# EAGLE board guc_kaynagi (EAGLE 9.6.2)
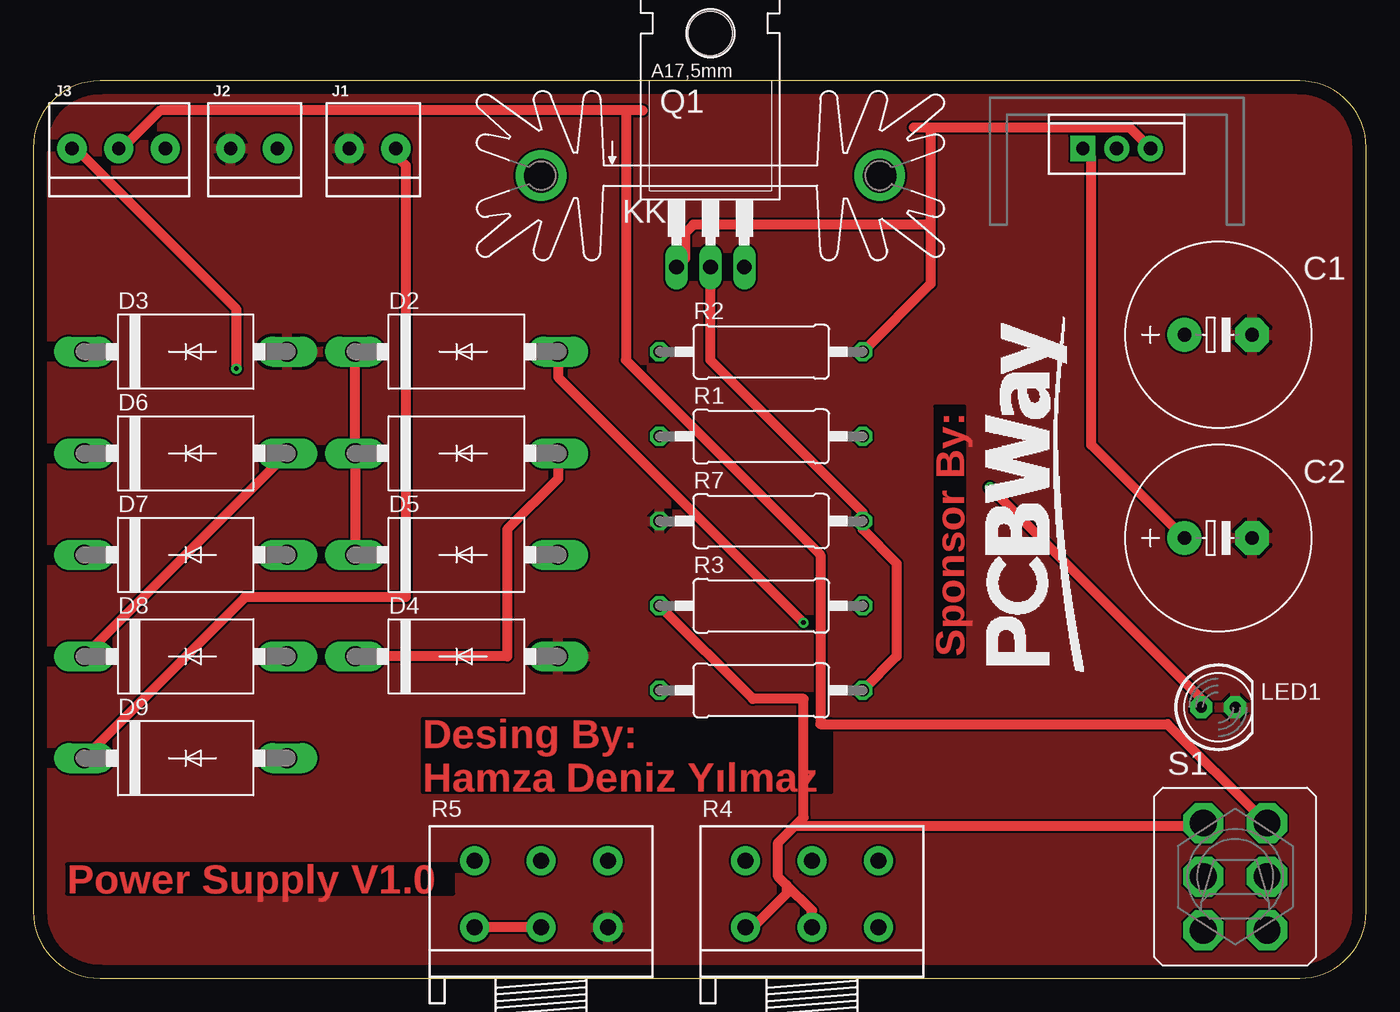
[diagram p0: board, top side]
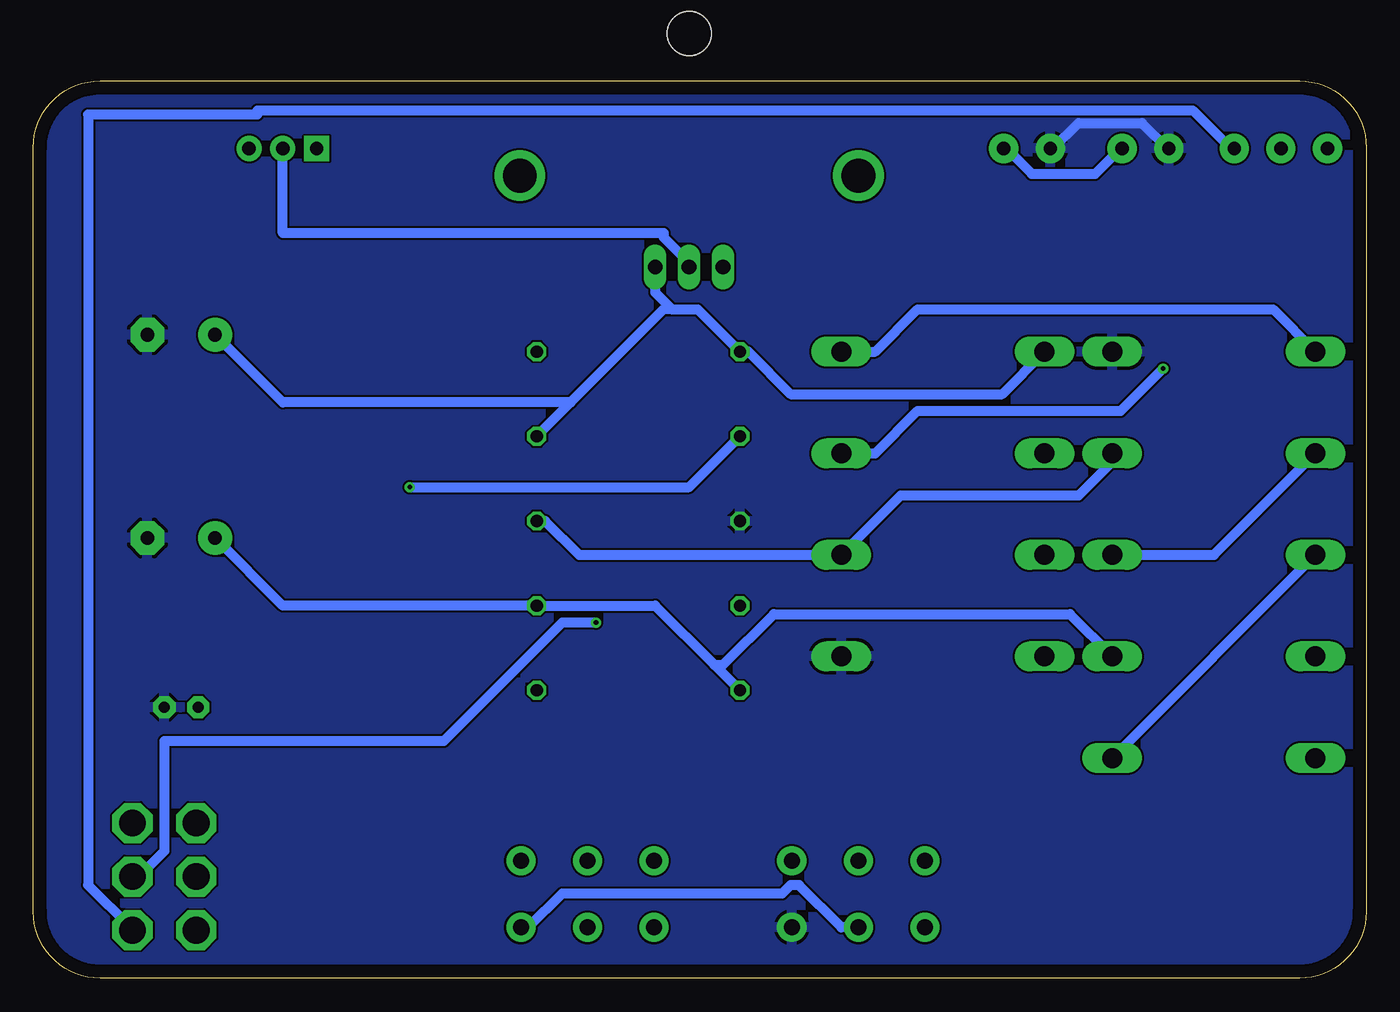
[diagram p1: board, bottom side, seen from below]

Size 100 x 67.3 mm. Coordinates in mm from the lower left corner, seen from the top.
Outline: 0,62.3 0,5 arc90 5,0 95,0 arc90 100,5 100,62.3 arc90 95,67.3 5,67.3 arc90 0,62.3
Copper layers (1*16): Top 0.035mm / dielectric 1.5mm / Bottom 0.035mm
Design rules "default *": minimum track width 30mil, minimum drill 0.35mm, track to track 6mil, track to pad 6mil, pad to pad 6mil, via to via 6mil, smd to smd 6mil, copper to edge 40mil, drill to drill 6mil, minimum pad ring 10mil, minimum via ring 8mil, stop-mask expansion 4mil, vias tented up to drill 15mil, thermal gap 10mil

## Footprints (pad centres in the part's own frame; a part is rotated, then mirrored left to right if it is on the bottom)
E5-13 = drill 1.016 pad 2.54: + -2.54,0 | drill 1.016 pad 2.54 octagon: - 2.54,0
DO201-15 = drill 1.499 long: A 7.62,0; C -7.62,0
TERMBLOCK_1X2-3.5MM = drill 1 pad 2.184: 1 1.8,0; 2 -1.7,0
TERMBLOCK_1X3-3.5MM = drill 1 pad 2.184: 1 3.55,0; 2 0.05,0; 3 -3.45,0
SK104-PAD = drill 2.54 pad 3.81: K1 -12.7,-0.762; K2 12.7,-0.762
LED5MM = drill 0.813 pad 1.676 octagon: A -1.27,0; K 1.27,0
TO220 = drill 1.118 long: 1 -2.54,-6.35; 2 0,-6.35; 3 2.54,-6.35 | hole 3.302: 0,11.176
0411/15 = drill 0.914 octagon: 1 -7.62,0; 2 7.62,0
3RP/1610G = drill 1.2 pad 2.184: 1-1 -5,0; 1-2 0,0; 1-3 5,0; 2-1 -5,5; 2-2 0,5; 2-3 5,5
320-938 = drill 2.007 octagon: 1 -2.388,4.013; 2 -2.388,0; 3 -2.388,-4.013; 4 2.388,4.013; 5 2.388,0; 6 2.388,-4.013
TO220-ADJ = drill 1 pad 1.88 square: ADJ -2.54,0 | drill 1 pad 1.88: IN 2.54,0; OUT 0,0

## Placement (x,y rotation side)
C1  2200u , 75V  [E5-13]  88.9,48.26 0 top
C2  10u, 75V  [E5-13]  88.9,33.02 0 top
D1  1N5408  [DO201-15]  31.75,39.37 0 top
D2  1N5408  [DO201-15]  31.75,46.99 0 top
D3  1N5408  [DO201-15]  11.43,46.99 0 top
D4  1N5408  [DO201-15]  31.75,24.13 0 top
D5  1N5408  [DO201-15]  31.75,31.75 0 top
D6  1N5408  [DO201-15]  11.43,39.37 0 top
D7  1N5408  [DO201-15]  11.43,31.75 0 top
D8  1N5400  [DO201-15]  11.43,24.13 0 top
D9  1N5408  [DO201-15]  11.43,16.51 0 top
J1  [TERMBLOCK_1X2-3.5MM]  25.4,62.23 0 top
J2  [TERMBLOCK_1X2-3.5MM]  16.51,62.23 0 top
J3  [TERMBLOCK_1X3-3.5MM]  6.35,62.23 0 top
KK1  SK104-PAD  [SK104-PAD]  50.8,60.96 0 top
LED1  [LED5MM]  88.9,20.32 0 top
Q1  TIP127  [TO220]  50.8,59.69 0 top
R1  6.8K  [0411/15]  54.61,40.64 0 top
R2  1 E,2W  [0411/15]  54.61,46.99 0 top
R3  2.2K ,0.5W  [0411/15]  54.61,27.94 0 top
R4  2.5K, 1W COARSE  [3RP/1610G]  58.42,3.81 0 top
R5  2.5K, 1W COARSE  [3RP/1610G]  38.1,3.81 0 top
R6  100E, 0.5W  [0411/15]  54.61,21.59 0 top
R7  10K , 1W  [0411/15]  54.61,34.29 0 top
S1  [320-938]  90.17,7.62 0 top
U1  V_REG_317SINK  [TO220-ADJ]  81.28,62.23 0 top
U$1  [PCBWAY]  80.01,21.59 90 top

## Library data of the parts
C1 C2 R1-R3 R6 R7 = rcl
D1-D9 = diode
J1-J3 = microbuilder
KK1 = heatsink
LED1 = adafruit
Q1 = transistor-pnp
R4 R5 = pot
S1 = switch
U1 = SparkFun-IC-Power
U$1 = pcbway

## Nets
AC0: J3.2 S1.4
AC20_1: D1.A D4.C J3.3
AC20_2: J3.1 S1.6
GND: C1.- C2.- D3.A D4.A J1.2 J2.2 LED1.K R5.1-3 R7.1
N$1: D6.C D7.A
N$2: D7.C D9.A
N$3: C1.+ D1.C D2.C D5.C Q1.3 R1.2 R2.1
N$4: LED1.A R1.1
N$5: Q1.1 R2.2 U1.IN
N$6: D5.A D6.A D8.C Q1.2 R6.2 R7.2 U1.OUT
N$7: C2.+ D8.A R3.2 R6.1 U1.ADJ
N$9: R4.1-3 R5.1-1 R5.1-2
N$10: D9.C J1.1 J2.1
N$11: R3.1 R4.1-1 R4.1-2 S1.1
N$12: D2.A D3.C S1.5

## Tracks (layer width: path | path; a pad name or v marks a point on that pad's centre or on a via)
AC0
  Top 0.762: 45.72,65.09 44.45,65.09 | 44.45,65.09 9.53,65.09 6.67,62.23 J3.2 | 44.45,65.09 44.45,46.36 59.05,31.75 59.05,19.05 85.09,19.05 92.08,12.07 S1.4
AC20_1  (via drill 0.35)
  Top 0.762: v15.24,45.72 15.24,50.17 3.18,62.23 J3.3 | D4.C 35.56,24.13 35.56,33.66 39.37,37.47 D1.A
  Bottom 0.762: 3.18,62.23 J3.3 | v15.24,45.72 18.41,42.55 33.65,42.55 36.83,39.37 D1.A
AC20_2
  Bottom 0.762: J3.1 10.16,62.23 13.02,65.09 83.19,65.09 83.19,64.77 95.89,64.77 95.89,6.98 92.71,3.81 S1.6
GND
  Top 0.762: 14.92,62.23 J2.2
  Bottom 0.762: J2.2 14.92,62.23 16.83,64.13 21.59,64.13 23.5,62.23 J1.2
  pour Top: 3.81,67.31 94.45,67.31 arc-45 97.98,65.85 99.06,64.77 arc-45 100.33,61.7 100.33,60.96 100.33,5.08 arc-45 99.43,2.91 99.06,2.54 97.42,0.9 arc-45 95.25,0 4.34,0 arc-45 1.27,1.27 arc-45 0,4.34 0,5.08 0,61.7 arc-45 1.27,64.77
  pour Bottom: 0,64.77 1.08,65.85 arc-45 4.61,67.31 6.35,67.31 95.99,67.31 arc-45 99.06,66.04 99.43,65.67 arc-45 100.33,63.5 100.33,5.61 arc-45 99.06,2.54 97.98,1.46 arc-45 94.45,0 3.81,0 arc-45 1.64,0.9 1.27,1.27 0.9,1.64 arc-45 0,3.81
N$1
  Bottom 0.762: D6.C 11.43,31.75 D7.A
N$2
  Bottom 0.762: D9.A D7.C
N$3
  Top 0.762: D5.C D1.C D2.C
  Bottom 0.762: 52.07,50.17 50.16,50.17 R2.1 46.35,46.99 43.18,43.81 27.3,43.81 D2.C | 52.07,50.17 53.34,51.44 Q1.3 | 59.69,43.18 52.7,50.17 52.07,50.17 | 59.69,43.18 R1.2 | C1.+ 81.28,43.18 59.69,43.18
N$4  (via drill 0.35)
  Top 0.762: v71.76,36.83 87.63,20.96 LED1.A
  Bottom 0.762: R1.1 50.8,36.83 v71.76,36.83
N$5
  Top 0.762: U1.IN 82.23,63.82 67.31,63.82 | 66.04,63.82 67.31,63.82 | R2.2 67.31,52.07 67.31,56.52 | 67.31,63.82 67.31,56.52 | Q1.1 48.89,53.97 48.89,55.88 49.53,56.52 67.31,56.52
N$6
  Top 0.762: D6.A D8.C | R6.2 64.77,24.13 64.77,31.11 62.23,33.66 R7.2 62.23,34.92 50.8,46.36 Q1.2
  Bottom 0.762: D6.A 19.05,38.73 21.59,36.2 34.92,36.2 D5.A 59.05,31.75 61.59,34.29 R7.2 | Q1.2 50.8,53.66 52.7,55.56 52.7,55.88 81.28,55.88 U1.OUT
N$7
  Top 0.762: U1.ADJ 79.38,61.59 79.38,40 C2.+
  Bottom 0.762: 48.89,23.5 53.34,27.94 R3.2 81.28,27.94 C2.+ | 48.89,23.5 R6.1 | D8.A 22.23,27.31 44.45,27.31 48.26,23.5 48.89,23.5
N$9
  Top 0.762: R5.1-2 R5.1-1
  Bottom 0.762: R5.1-2 39.37,3.81 42.54,6.98 43.18,6.98 43.81,6.35 60.32,6.35 62.87,3.81 R4.1-3
N$10
  Top 0.762: 26.99,62.23 J1.1 27.3,62.23 27.3,61.59 27.94,60.96 27.94,28.57 15.88,28.57 D9.C
  Bottom 0.762: J2.1 18.41,62.23 20.32,60.33 25.08,60.33 26.99,62.23 J1.1
N$11
  Top 0.762: R3.1 53.97,20.96 57.78,20.96 57.78,12.07 57.15,11.43 | 57.15,11.43 55.88,10.16 55.88,7.62 56.51,6.98 | 56.51,6.98 58.42,5.08 R4.1-2 | 56.51,6.98 56.51,6.35 53.97,3.81 R4.1-1 | 57.15,11.43 87.63,11.43 S1.1
N$12  (via drill 0.35)
  Top 0.762: v57.78,26.67 39.37,45.08 D2.A
  Bottom 0.762: D3.C 6.99,50.17 33.65,50.17 36.83,46.99 D2.A | v57.78,26.67 60.32,26.67 69.22,17.78 90.17,17.78 90.17,9.53 92.08,7.62 S1.5

## Text on the board
Top: Sponsor By: | Desing By: / Hamza Deniz Yılmaz | Power Supply V1.0
tStop: Sponsor By: | Desing By: / Hamza Deniz Yılmaz | Power Supply V1.0